# EAGLE board AudioCompressor_PCB (EAGLE 7.2.0)
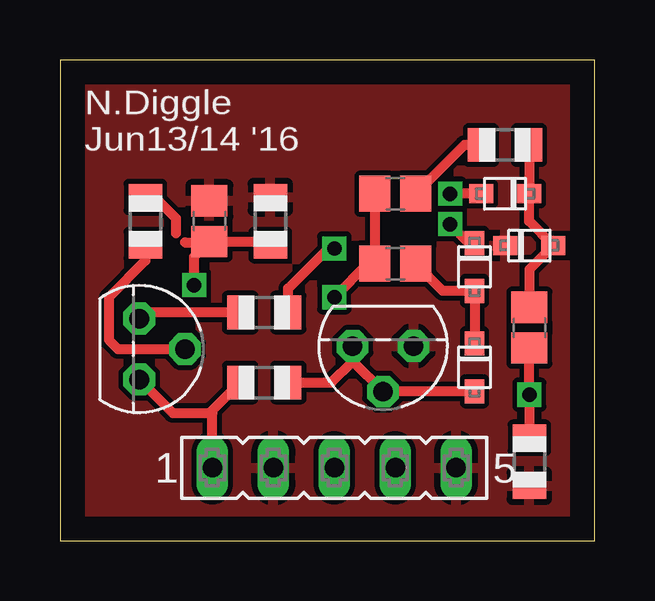
[diagram p0: board, top side]
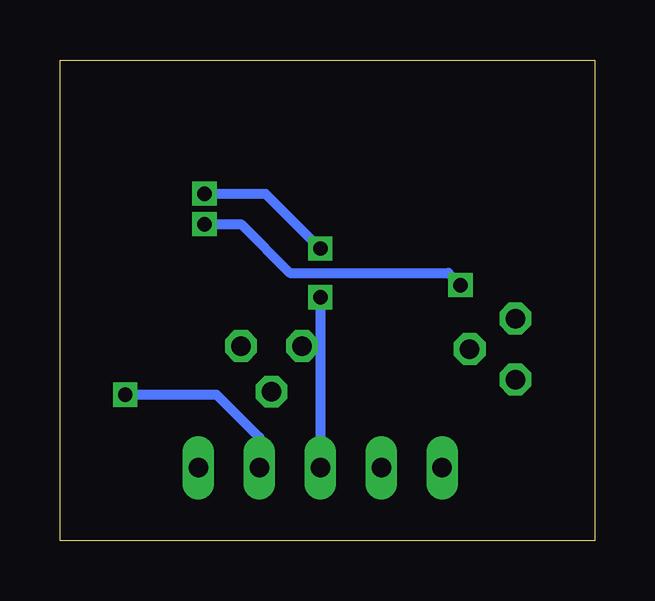
[diagram p1: board, bottom side, seen from below]

Size 22.28 x 20.06 mm. Coordinates in mm from the lower left corner, seen from the top.
Outline: 0,0 22.28,0 22.28,20.06 0,20.06 0,0
Copper layers (1*16): Top 0.035mm / dielectric 1.5mm / Bottom 0.035mm
Design rules "default": minimum track width 10mil, minimum drill 24mil, track to track 8mil, track to pad 8mil, pad to pad 8mil, via to via 8mil, smd to smd 8mil, copper to edge 40mil, drill to drill 8mil, minimum pad ring 10mil, minimum via ring 8mil, stop-mask expansion 4mil, vias tented up to drill 0mil, thermal gap 10mil

## Footprints (pad centres in the part's own frame; a part is rotated, then mirrored left to right if it is on the bottom)
C0805 = smd 1.3 x 1.5: 1 -0.85,0; 2 0.85,0
SOD-323F = smd 1 x 0.8: A -1,0; C 1,0
R0805 = smd 1.1 x 1.4: 1 -1,0; 2 1,0
FE05-1 = drill 0.813 long: 1 -5.08,0; 2 -2.54,0; 3 0,0; 4 2.54,0; 5 5.08,0
TO92 = drill 0.813 octagon: 1 1.27,0; 2 0,1.905; 3 -1.27,0

## Placement (x,y rotation side)
C1  0.22uF  [C0805]  13.97,14.48 0 top
C2  0.22uF  [C0805]  19.56,8.89 270 top
C3  0.47uF  [C0805]  13.97,11.56 0 top
C4  0.47uF  [C0805]  6.22,13.34 90 top
D1  [SOD-323F]  17.27,7.24 90 top
D2  [SOD-323F]  17.27,11.43 90 top
D3  [SOD-323F]  18.54,14.48 0 top
D4  [SOD-323F]  19.56,12.32 180 top
R1  10k  [R0805]  18.54,16.51 0 top
R2  100k  [R0805]  19.56,3.3 90 top
R3  10k  [R0805]  8.51,6.6 180 top
R4  240k  [R0805]  8.76,13.34 270 top
R5  100  [R0805]  3.56,13.34 90 top
R6  6.8k  [R0805]  8.51,9.53 180 top
SV1  [FE05-1]  11.43,3.05 0 top
T1  2N3904  [TO92]  13.46,8.13 180 top
T2  2N3904  [TO92]  3.3,8 270 top

## Library data of the parts
C1-C4 D1-D4 R1-R6 = adafruit
SV1 = con-lsta; OC_FARNELL: unknown; OC_NEWARK: unknown
T1 T2 = transistor

## Nets
GND: C4.2 D4.C R2.1 R4.1 SV1.2 SV1.5 T1.3
N$2: C1.2 R1.1
N$3: C2.1 D3.C D4.A R1.2
N$5: R5.1 T2.2
N$6: C4.1 D2.C R4.2
N$7: R6.2 T2.3
N$8: D1.A R3.1 T1.1 T1.2
N$9: D3.A R6.1
N$10: C3.2 D1.C D2.A
S$1: R5.2
VCC: R3.2 SV1.1 T2.1
VIN: C1.1 C3.1 SV1.3
VOUT: C2.2 R2.2 SV1.4

## Tracks (layer width: path | path; a pad name or v marks a point on that pad's centre or on a via)
GND
  pour Top: -0.51,20.32 -0.51,-0.51 22.86,-0.51 22.86,20.32
N$2
  Top 0.406: R1.1 16.85,16.51 C1.2
N$3
  Top 0.406: C2.1 19.56,11.32 D4.A 19.54,13.34 D3.C R1.2
N$5
  Top 0.406: R5.1 3.56,11.68 2.03,10.16 2.03,8.38 2.41,8 T2.2
N$6  (via drill 0.6)
  Top 0.406: 5.21,12.45 6.18,12.45 C4.1 | C4.1 8.61,12.48 R4.2 | D2.C 17.03,12.43 v16.26,13.21 | v5.59,10.67 5.59,11.85 C4.1
  Bottom 0.406: v16.26,13.21 14.73,13.21 12.7,11.18 6.1,11.18 v5.59,10.67
N$7
  Top 0.406: R6.2 3.56,9.53 T2.3
N$8
  Top 0.406: 12.19,7.49 T1.2 13.48,6.24 D1.A | 12.19,7.49 T1.1 | R3.1 11.3,6.6 12.19,7.49
N$9  (via drill 0.6)
  Top 0.406: R6.1 9.51,10.53 11.18,12.19 v11.43,12.19 | D3.A v16.26,14.48
  Bottom 0.406: v16.26,14.48 13.72,14.48 v11.43,12.19
N$10
  Top 0.406: C3.2 15.95,10.43 D2.A D1.C
S$1
  Top 0.406: R5.2 3.95,14.34 4.83,13.46 4.83,12.83
VCC
  Top 0.406: SV1.1 6.35,5.33 | 6.35,5.33 6.35,5.45 R3.2 | T2.1 4.7,5.33 6.35,5.33
VIN  (via drill 0.6)
  Top 0.406: v11.43,10.16 12.83,11.56 C3.1 C1.1
  Bottom 0.406: v11.43,10.16 SV1.3
VOUT  (via drill 0.6)
  Top 0.406: R2.2 v19.56,6.1 C2.2
  Bottom 0.406: SV1.4 13.97,4.32 15.75,6.1 v19.56,6.1

## Text on the board
tNames: N.Diggle / Jun13/14 '16